# Altium PCB 十六路输入.PcbDoc (part 3 of 3)
Units mm, origin at the board's own origin, x right, y up, seen from the top; angles counter-clockwise.
Board outline 122.4 x 87.4 mm, 2 copper layers (Top Layer, Bottom Layer); 111 components, 112 nets, 343 pads, 40 vias.
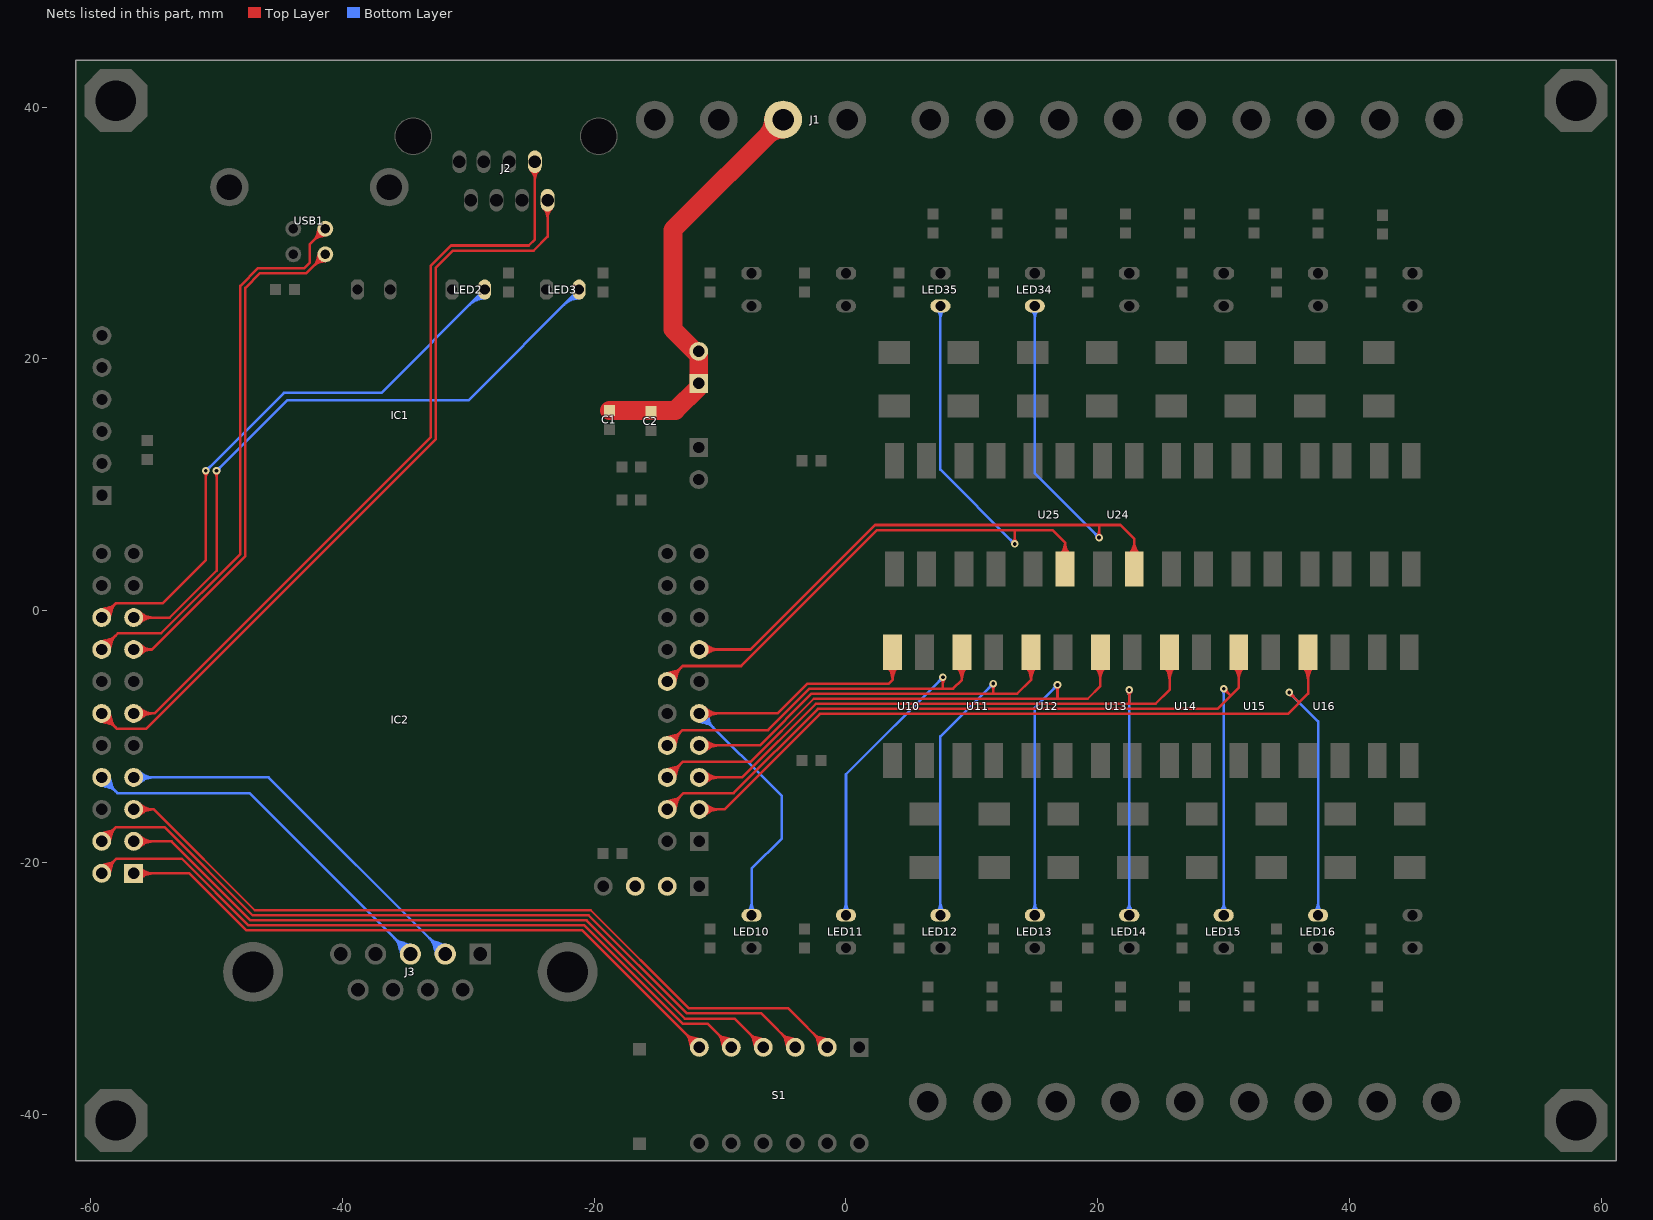
[diagram p3: the nets of this part, all layers, seen from the top]

## Via types
v1: diameter 0.6, hole 0.3, Top Layer to Bottom Layer, 40 vias

## Nets (pads, with @x,y where several pads share a name; then routed paths per layer and width w, separated by ;. In a path a pad name is that pad's centre, name@x,y a point inside that pad or via, vN(x,y) a via of type N, cw(c..) or ccw(c..) an arc to the next point about the centre after c; other vN are vias at no path point) (continued)
PB13: IC2.34 LED10.K U10.4 | length 70.6
  Top Layer w0.2: IC2.34@-11.66,-8.17 -5.43,-8.17 -3.06,-5.8 3.4,-5.8 3.7,-5.5 ; U10.4@3.7,-3.3 3.7,-5.5 ; -10.574,-8.17 cw(c-10.574,-7.084) -11.342,-7.852 ccw(c-10.574,-7.084) -10.574,-8.17 ; -10.574,-8.17 ccw(c-10.574,-9.256) -11.342,-8.488 cw(c-10.574,-9.256) -10.574,-8.17 ; -10.091,-8.17 cw(c-10.091,-6.601) -11.2,-7.71 ccw(c-10.091,-6.601) -10.091,-8.17 ; -10.091,-8.17 ccw(c-10.091,-9.739) -11.2,-8.63 cw(c-10.091,-9.739) -10.091,-8.17 ; 3.7,-5.5 cw(c5.223,-5.5) 4.156,-4.414 ccw(c5.223,-5.5) 3.7,-5.5 ; 3.7,-5.5 ccw(c2.177,-5.5) 3.244,-4.414 cw(c2.177,-5.5) 3.7,-5.5 ; 3.7,-5.023 cw(c4.754,-5.023) 4.015,-4.271 ccw(c4.754,-5.023) 3.7,-5.023 ; 3.7,-5.023 ccw(c2.646,-5.023) 3.385,-4.271 cw(c2.646,-5.023) 3.7,-5.023
  Bottom Layer w0.2: IC2.34@-12.003,-8.24 ccw(c-11.167,-8.069) -11.388,-8.893 ; IC2.34@-11.807,-8.2 ccw(c-10.813,-7.997) -11.076,-8.977 ; IC2.34@-11.66,-8.17 -5.1,-14.73 -5.1,-18.1 -7.5,-20.5 LED10.K@-7.5,-24.3 ; IC2.34@-11.63,-8.023 cw(c-11.833,-9.017) -10.853,-8.754 ; IC2.34@-11.59,-7.827 cw(c-11.761,-8.663) -10.937,-8.442 ; -10.892,-8.938 cw(c-10.124,-8.17) -11.21,-8.17 ccw(c-10.124,-8.17) -10.892,-8.938 ; -10.892,-8.938 ccw(c-11.66,-9.706) -11.66,-8.62 cw(c-11.66,-9.706) -10.892,-8.938 ; -10.55,-9.28 cw(c-9.441,-8.17) -11.01,-8.17 ccw(c-9.441,-8.17) -10.55,-9.28 ; -10.55,-9.28 ccw(c-11.66,-10.389) -11.66,-8.82 cw(c-11.66,-10.389) -10.55,-9.28 ; -7.5,-23.215 cw(c-8.485,-23.215) -7.788,-23.912 ccw(c-8.485,-23.215) -7.5,-23.215 ; -7.5,-23.215 ccw(c-6.515,-23.215) -7.212,-23.912 cw(c-6.515,-23.215) -7.5,-23.215
PB14: IC2.35 LED11.K U11.4 | length 79.2
  Top Layer w0.2: IC2.35@-14.543,-10.64 cw(c-13.707,-10.811) -13.928,-9.987 ; IC2.35@-14.347,-10.68 cw(c-13.353,-10.883) -13.616,-9.903 ; IC2.35@-14.201,-10.66 ccw(c-14.208,-10.046) -13.615,-10.205 ; IC2.35@-14.2,-10.71 -12.99,-9.5 -6.194,-9.5 -2.894,-6.2 7.7,-6.2 ; IC2.35@-14.17,-10.857 ccw(c-14.373,-9.863) -13.393,-10.126 ; IC2.35@-14.15,-10.711 cw(c-13.536,-10.718) -13.695,-10.125 ; IC2.35@-14.13,-11.053 ccw(c-14.301,-10.217) -13.477,-10.438 ; v1(7.7,-5.3) 7.7,-6.2 ; U11.4@9.2,-3.3 9.2,-5.5 ; -13.432,-9.942 cw(c-14.2,-9.174) -14.2,-10.26 ccw(c-14.2,-9.174) -13.432,-9.942 ; -13.432,-9.942 ccw(c-12.664,-10.71) -13.75,-10.71 cw(c-12.664,-10.71) -13.432,-9.942 ; -13.09,-9.6 cw(c-14.2,-8.491) -14.2,-10.06 ccw(c-14.2,-8.491) -13.09,-9.6 ; -13.09,-9.6 ccw(c-11.981,-10.71) -13.55,-10.71 cw(c-11.981,-10.71) -13.09,-9.6 ; 7.7,-6.2 8.5,-6.2 9.2,-5.5 ; 7.7,-5.783 cw(c8.183,-5.783) 7.841,-5.441 ccw(c8.183,-5.783) 7.7,-5.783 ; 7.7,-5.783 ccw(c7.217,-5.783) 7.559,-5.441 cw(c7.217,-5.783) 7.7,-5.783 ; 9.2,-5.5 cw(c10.723,-5.5) 9.656,-4.414 ccw(c10.723,-5.5) 9.2,-5.5 ; 9.2,-5.5 ccw(c7.677,-5.5) 8.744,-4.414 cw(c7.677,-5.5) 9.2,-5.5 ; 9.2,-5.023 cw(c10.254,-5.023) 9.515,-4.271 ccw(c10.254,-5.023) 9.2,-5.023 ; 9.2,-5.023 ccw(c8.146,-5.023) 8.885,-4.271 cw(c8.146,-5.023) 9.2,-5.023
  Bottom Layer w0.2: LED11.K@0,-24.3 0,-13 v1(7.7,-5.3) ; 0,-23.215 cw(c-0.985,-23.215) -0.288,-23.912 ccw(c-0.985,-23.215) 0,-23.215 ; 0,-23.215 ccw(c0.985,-23.215) 0.288,-23.912 cw(c0.985,-23.215) 0,-23.215 ; 7.359,-5.641 cw(c7.7,-5.983) 7.7,-5.5 ccw(c7.7,-5.983) 7.359,-5.641 ; 7.359,-5.641 ccw(c7.017,-5.3) 7.5,-5.3 cw(c7.017,-5.3) 7.359,-5.641
PB15: IC2.36 LED12.K U12.4 | length 74.4
  Top Layer w0.2: IC2.36@-11.66,-10.71 -6.838,-10.71 -2.728,-6.6 11.7,-6.6 ; v1(11.7,-5.8) 11.7,-6.6 ; U12.4@14.7,-3.3 14.7,-5.5 ; -10.574,-10.71 cw(c-10.574,-9.624) -11.342,-10.392 ccw(c-10.574,-9.624) -10.574,-10.71 ; -10.574,-10.71 ccw(c-10.574,-11.796) -11.342,-11.028 cw(c-10.574,-11.796) -10.574,-10.71 ; -10.091,-10.71 cw(c-10.091,-9.141) -11.2,-10.25 ccw(c-10.091,-9.141) -10.091,-10.71 ; -10.091,-10.71 ccw(c-10.091,-12.279) -11.2,-11.17 cw(c-10.091,-12.279) -10.091,-10.71 ; 11.7,-6.6 13.6,-6.6 14.7,-5.5 ; 11.7,-6.283 cw(c12.183,-6.283) 11.841,-5.941 ccw(c12.183,-6.283) 11.7,-6.283 ; 11.7,-6.283 ccw(c11.217,-6.283) 11.559,-5.941 cw(c11.217,-6.283) 11.7,-6.283 ; 14.7,-5.5 cw(c16.223,-5.5) 15.156,-4.414 ccw(c16.223,-5.5) 14.7,-5.5 ; 14.7,-5.5 ccw(c13.177,-5.5) 14.244,-4.414 cw(c13.177,-5.5) 14.7,-5.5 ; 14.7,-5.023 cw(c15.754,-5.023) 15.015,-4.271 ccw(c15.754,-5.023) 14.7,-5.023 ; 14.7,-5.023 ccw(c13.646,-5.023) 14.385,-4.271 cw(c13.646,-5.023) 14.7,-5.023
  Bottom Layer w0.2: LED12.K@7.5,-24.3 7.5,-10 v1(11.7,-5.8) ; 7.5,-23.215 cw(c6.515,-23.215) 7.212,-23.912 ccw(c6.515,-23.215) 7.5,-23.215 ; 7.5,-23.215 ccw(c8.485,-23.215) 7.788,-23.912 cw(c8.485,-23.215) 7.5,-23.215 ; 11.359,-6.141 cw(c11.7,-6.483) 11.7,-6 ccw(c11.7,-6.483) 11.359,-6.141 ; 11.359,-6.141 ccw(c11.017,-5.8) 11.5,-5.8 cw(c11.017,-5.8) 11.359,-6.141
PC0: IC2.1 S1.6 | length 73.1
  Top Layer w0.2: IC2.1@-56.58,-20.87 -52.158,-20.87 -47.628,-25.4 -20.94,-25.4 S1.6@-11.65,-34.69 ; -12.457,-34.106 ccw(c-11.477,-33.843) S1.6@-11.68,-34.837 ; -12.373,-34.418 ccw(c-11.549,-34.197) S1.6@-11.72,-35.033 ; -12.235,-34.185 ccw(c-11.642,-34.026) S1.6@-11.649,-34.64 ; -12.234,-33.883 cw(c-12.497,-34.863) S1.6@-11.503,-34.66 ; -12.155,-34.105 cw(c-12.314,-34.698) S1.6@-11.7,-34.691 ; -11.922,-33.967 cw(c-12.143,-34.791) S1.6@-11.307,-34.62 ; -55.494,-20.87 cw(c-55.494,-19.784) -56.262,-20.552 ccw(c-55.494,-19.784) -55.494,-20.87 ; -55.494,-20.87 ccw(c-55.494,-21.956) -56.262,-21.188 cw(c-55.494,-21.956) -55.494,-20.87 ; -55.011,-20.87 cw(c-55.011,-19.301) -56.12,-20.41 ccw(c-55.011,-19.301) -55.011,-20.87 ; -55.011,-20.87 ccw(c-55.011,-22.439) -56.12,-21.33 cw(c-55.011,-22.439) -55.011,-20.87 ; -12.76,-33.58 cw(c-13.869,-34.69) -12.3,-34.69 ccw(c-13.869,-34.69) -12.76,-33.58 ; -12.76,-33.58 ccw(c-11.65,-32.471) -11.65,-34.04 cw(c-11.65,-32.471) -12.76,-33.58 ; -12.418,-33.922 cw(c-13.186,-34.69) -12.1,-34.69 ccw(c-13.186,-34.69) -12.418,-33.922 ; -12.418,-33.922 ccw(c-11.65,-33.154) -11.65,-34.24 cw(c-11.65,-33.154) -12.418,-33.922
PC1: IC2.2 S1.5 | length 84.8
  Top Layer w0.2: IC2.2@-59.463,-20.8 cw(c-58.627,-20.971) -58.848,-20.147 ; IC2.2@-59.267,-20.84 cw(c-58.273,-21.043) -58.536,-20.063 ; IC2.2@-59.121,-20.82 ccw(c-59.128,-20.206) -58.535,-20.365 ; IC2.2@-59.12,-20.87 -57.95,-19.7 -52.763,-19.7 -47.463,-25 -20.774,-25 -12.974,-32.8 -11,-32.8 S1.5@-9.11,-34.69 ; IC2.2@-59.09,-21.017 ccw(c-59.293,-20.023) -58.313,-20.286 ; IC2.2@-59.07,-20.871 cw(c-58.456,-20.878) -58.615,-20.285 ; IC2.2@-59.05,-21.213 ccw(c-59.221,-20.377) -58.397,-20.598 ; -9.917,-34.106 ccw(c-8.937,-33.843) S1.5@-9.14,-34.837 ; -9.833,-34.418 ccw(c-9.009,-34.197) S1.5@-9.18,-35.033 ; -9.695,-34.185 ccw(c-9.102,-34.026) S1.5@-9.109,-34.64 ; -9.694,-33.883 cw(c-9.957,-34.863) S1.5@-8.963,-34.66 ; -9.615,-34.105 cw(c-9.774,-34.698) S1.5@-9.16,-34.691 ; -9.382,-33.967 cw(c-9.603,-34.791) S1.5@-8.767,-34.62 ; -58.352,-20.102 cw(c-59.12,-19.334) -59.12,-20.42 ccw(c-59.12,-19.334) -58.352,-20.102 ; -58.352,-20.102 ccw(c-57.584,-20.87) -58.67,-20.87 cw(c-57.584,-20.87) -58.352,-20.102 ; -58.01,-19.76 cw(c-59.12,-18.651) -59.12,-20.22 ccw(c-59.12,-18.651) -58.01,-19.76 ; -58.01,-19.76 ccw(c-56.901,-20.87) -58.47,-20.87 cw(c-56.901,-20.87) -58.01,-19.76 ; -10.22,-33.58 cw(c-11.329,-34.69) -9.76,-34.69 ccw(c-11.329,-34.69) -10.22,-33.58 ; -10.22,-33.58 ccw(c-9.11,-32.471) -9.11,-34.04 cw(c-9.11,-32.471) -10.22,-33.58 ; -9.878,-33.922 cw(c-10.646,-34.69) -9.56,-34.69 ccw(c-10.646,-34.69) -9.878,-33.922 ; -9.878,-33.922 ccw(c-9.11,-33.154) -9.11,-34.24 cw(c-9.11,-33.154) -9.878,-33.922
PC2: IC2.3 S1.4 | length 79.2
  Top Layer w0.2: IC2.3@-56.58,-18.33 -53.567,-18.33 -47.297,-24.6 -20.609,-24.6 -12.809,-32.4 -8.86,-32.4 S1.4@-6.57,-34.69 ; -7.377,-34.106 ccw(c-6.397,-33.843) S1.4@-6.6,-34.837 ; -7.293,-34.418 ccw(c-6.469,-34.197) S1.4@-6.64,-35.033 ; -7.155,-34.185 ccw(c-6.562,-34.026) S1.4@-6.569,-34.64 ; -7.154,-33.883 cw(c-7.417,-34.863) S1.4@-6.423,-34.66 ; -7.075,-34.105 cw(c-7.234,-34.698) S1.4@-6.62,-34.691 ; -6.842,-33.967 cw(c-7.063,-34.791) S1.4@-6.227,-34.62 ; -55.494,-18.33 cw(c-55.494,-17.244) -56.262,-18.012 ccw(c-55.494,-17.244) -55.494,-18.33 ; -55.494,-18.33 ccw(c-55.494,-19.416) -56.262,-18.648 cw(c-55.494,-19.416) -55.494,-18.33 ; -55.011,-18.33 cw(c-55.011,-16.761) -56.12,-17.87 ccw(c-55.011,-16.761) -55.011,-18.33 ; -55.011,-18.33 ccw(c-55.011,-19.899) -56.12,-18.79 cw(c-55.011,-19.899) -55.011,-18.33 ; -7.68,-33.58 cw(c-8.789,-34.69) -7.22,-34.69 ccw(c-8.789,-34.69) -7.68,-33.58 ; -7.68,-33.58 ccw(c-6.57,-32.471) -6.57,-34.04 cw(c-6.57,-32.471) -7.68,-33.58 ; -7.338,-33.922 cw(c-8.106,-34.69) -7.02,-34.69 ccw(c-8.106,-34.69) -7.338,-33.922 ; -7.338,-33.922 ccw(c-6.57,-33.154) -6.57,-34.24 cw(c-6.57,-33.154) -7.338,-33.922
PC3: IC2.4 S1.3 | length 90.9
  Top Layer w0.2: IC2.4@-59.463,-18.26 cw(c-58.627,-18.431) -58.848,-17.607 ; IC2.4@-59.267,-18.3 cw(c-58.273,-18.503) -58.536,-17.523 ; IC2.4@-59.121,-18.28 ccw(c-59.128,-17.666) -58.535,-17.825 ; IC2.4@-59.12,-18.33 -57.99,-17.2 -54.131,-17.2 -47.131,-24.2 -20.443,-24.2 -12.643,-32 -6.72,-32 S1.3@-4.03,-34.69 ; IC2.4@-59.09,-18.477 ccw(c-59.293,-17.483) -58.313,-17.746 ; IC2.4@-59.07,-18.331 cw(c-58.456,-18.338) -58.615,-17.745 ; IC2.4@-59.05,-18.673 ccw(c-59.221,-17.837) -58.397,-18.058 ; -4.837,-34.106 ccw(c-3.857,-33.843) S1.3@-4.06,-34.837 ; -4.753,-34.418 ccw(c-3.929,-34.197) S1.3@-4.1,-35.033 ; -4.615,-34.185 ccw(c-4.022,-34.026) S1.3@-4.029,-34.64 ; -4.614,-33.883 cw(c-4.877,-34.863) S1.3@-3.883,-34.66 ; -4.535,-34.105 cw(c-4.694,-34.698) S1.3@-4.08,-34.691 ; -4.302,-33.967 cw(c-4.523,-34.791) S1.3@-3.687,-34.62 ; -58.352,-17.562 cw(c-59.12,-16.794) -59.12,-17.88 ccw(c-59.12,-16.794) -58.352,-17.562 ; -58.352,-17.562 ccw(c-57.584,-18.33) -58.67,-18.33 cw(c-57.584,-18.33) -58.352,-17.562 ; -58.01,-17.22 cw(c-59.12,-16.111) -59.12,-17.68 ccw(c-59.12,-16.111) -58.01,-17.22 ; -58.01,-17.22 ccw(c-56.901,-18.33) -58.47,-18.33 cw(c-56.901,-18.33) -58.01,-17.22 ; -5.14,-33.58 cw(c-6.249,-34.69) -4.68,-34.69 ccw(c-6.249,-34.69) -5.14,-33.58 ; -5.14,-33.58 ccw(c-4.03,-32.471) -4.03,-34.04 cw(c-4.03,-32.471) -5.14,-33.58 ; -4.798,-33.922 cw(c-5.566,-34.69) -4.48,-34.69 ccw(c-5.566,-34.69) -4.798,-33.922 ; -4.798,-33.922 ccw(c-4.03,-33.154) -4.03,-34.24 cw(c-4.03,-33.154) -4.798,-33.922
PC4: IC2.30 LED34.K U24.4 | length 85.8
  Top Layer w0.2: IC2.30@-11.66,-3.09 -7.587,-3.09 2.303,6.8 20.1,6.8 ; v1(20.1,5.8) 20.1,6.8 ; U24.4@22.9,3.3 22.9,5.7 21.8,6.8 20.1,6.8 ; -10.574,-3.09 cw(c-10.574,-2.004) -11.342,-2.772 ccw(c-10.574,-2.004) -10.574,-3.09 ; -10.574,-3.09 ccw(c-10.574,-4.176) -11.342,-3.408 cw(c-10.574,-4.176) -10.574,-3.09 ; -10.091,-3.09 cw(c-10.091,-1.521) -11.2,-2.63 ccw(c-10.091,-1.521) -10.091,-3.09 ; -10.091,-3.09 ccw(c-10.091,-4.659) -11.2,-3.55 cw(c-10.091,-4.659) -10.091,-3.09 ; 20.1,6.283 cw(c19.617,6.283) 19.959,5.941 ccw(c19.617,6.283) 20.1,6.283 ; 20.1,6.283 ccw(c20.583,6.283) 20.241,5.941 cw(c20.583,6.283) 20.1,6.283 ; 22.9,5.036 cw(c21.814,5.036) 22.582,4.268 ccw(c21.814,5.036) 22.9,5.036 ; 22.9,5.036 ccw(c23.986,5.036) 23.218,4.268 cw(c23.986,5.036) 22.9,5.036 ; 22.9,5.519 cw(c21.331,5.519) 22.44,4.41 ccw(c21.331,5.519) 22.9,5.519 ; 22.9,5.519 ccw(c24.469,5.519) 23.36,4.41 cw(c24.469,5.519) 22.9,5.519
  Bottom Layer w0.2: LED34.K@15,24.2 15,10.9 v1(20.1,5.8) ; 15,23.215 cw(c15.985,23.215) 15.289,23.912 ccw(c15.985,23.215) 15,23.215 ; 15,23.215 ccw(c14.015,23.215) 14.712,23.912 cw(c14.015,23.215) 15,23.215 ; 19.759,6.141 cw(c19.417,5.8) 19.9,5.8 ccw(c19.417,5.8) 19.759,6.141 ; 19.759,6.141 ccw(c20.1,6.483) 20.1,6 cw(c20.1,6.483) 19.759,6.141
PC5: IC2.31 LED35.K U25.4 | length 89.1
  Top Layer w0.2: IC2.31@-14.543,-5.56 cw(c-13.707,-5.731) -13.928,-4.907 ; IC2.31@-14.347,-5.6 cw(c-13.353,-5.803) -13.616,-4.823 ; IC2.31@-14.201,-5.58 ccw(c-14.208,-4.966) -13.615,-5.125 ; IC2.31@-14.2,-5.63 -12.97,-4.4 -8.331,-4.4 2.469,6.4 13.4,6.4 ; IC2.31@-14.17,-5.777 ccw(c-14.373,-4.783) -13.393,-5.046 ; IC2.31@-14.15,-5.631 cw(c-13.536,-5.638) -13.695,-5.045 ; IC2.31@-14.13,-5.973 ccw(c-14.301,-5.137) -13.477,-5.358 ; v1(13.4,5.3) 13.4,6.4 ; U25.4@17.4,3.3 17.4,5.4 ; -13.432,-4.862 cw(c-14.2,-4.094) -14.2,-5.18 ccw(c-14.2,-4.094) -13.432,-4.862 ; -13.432,-4.862 ccw(c-12.664,-5.63) -13.75,-5.63 cw(c-12.664,-5.63) -13.432,-4.862 ; -13.09,-4.52 cw(c-14.2,-3.411) -14.2,-4.98 ccw(c-14.2,-3.411) -13.09,-4.52 ; -13.09,-4.52 ccw(c-11.981,-5.63) -13.55,-5.63 cw(c-11.981,-5.63) -13.09,-4.52 ; 13.4,5.783 cw(c12.917,5.783) 13.259,5.441 ccw(c12.917,5.783) 13.4,5.783 ; 13.4,5.783 ccw(c13.883,5.783) 13.541,5.441 cw(c13.883,5.783) 13.4,5.783 ; 13.4,6.4 16.4,6.4 17.4,5.4 ; 17.4,4.954 cw(c16.505,4.954) 17.101,4.286 ccw(c16.505,4.954) 17.4,4.954 ; 17.4,4.954 ccw(c18.295,4.954) 17.699,4.286 cw(c18.295,4.954) 17.4,4.954 ; 17.4,5.4 cw(c16.108,5.4) 16.968,4.435 ccw(c16.108,5.4) 17.4,5.4 ; 17.4,5.4 ccw(c18.692,5.4) 17.832,4.435 cw(c18.692,5.4) 17.4,5.4
  Bottom Layer w0.2: LED35.K@7.5,24.2 7.5,11.2 v1(13.4,5.3) ; 7.5,23.215 cw(c8.485,23.215) 7.788,23.912 ccw(c8.485,23.215) 7.5,23.215 ; 7.5,23.215 ccw(c6.515,23.215) 7.212,23.912 cw(c6.515,23.215) 7.5,23.215 ; 13.059,5.641 cw(c12.717,5.3) 13.2,5.3 ccw(c12.717,5.3) 13.059,5.641 ; 13.059,5.641 ccw(c13.4,5.983) 13.4,5.5 cw(c13.4,5.983) 13.059,5.641
PC6: IC2.37 LED13.K U13.4 | length 88.9
  Top Layer w0.2: IC2.37@-14.543,-13.18 cw(c-13.707,-13.351) -13.928,-12.527 ; IC2.37@-14.347,-13.22 cw(c-13.353,-13.423) -13.616,-12.443 ; IC2.37@-14.201,-13.2 ccw(c-14.208,-12.586) -13.615,-12.745 ; IC2.37@-14.2,-13.25 -12.95,-12 -7.563,-12 -2.563,-7 16.8,-7 ; IC2.37@-14.17,-13.397 ccw(c-14.373,-12.403) -13.393,-12.666 ; IC2.37@-14.15,-13.251 cw(c-13.536,-13.258) -13.695,-12.665 ; IC2.37@-14.13,-13.593 ccw(c-14.301,-12.757) -13.477,-12.978 ; v1(16.8,-5.9) 16.8,-7 ; U13.4@20.2,-3.3 20.2,-6 19.2,-7 16.8,-7 ; -13.432,-12.482 cw(c-14.2,-11.714) -14.2,-12.8 ccw(c-14.2,-11.714) -13.432,-12.482 ; -13.432,-12.482 ccw(c-12.664,-13.25) -13.75,-13.25 cw(c-12.664,-13.25) -13.432,-12.482 ; -13.09,-12.14 cw(c-14.2,-11.031) -14.2,-12.6 ccw(c-14.2,-11.031) -13.09,-12.14 ; -13.09,-12.14 ccw(c-11.981,-13.25) -13.55,-13.25 cw(c-11.981,-13.25) -13.09,-12.14 ; 16.8,-6.383 cw(c17.283,-6.383) 16.941,-6.041 ccw(c17.283,-6.383) 16.8,-6.383 ; 16.8,-6.383 ccw(c16.317,-6.383) 16.659,-6.041 cw(c16.317,-6.383) 16.8,-6.383 ; 20.2,-5.519 cw(c21.769,-5.519) 20.66,-4.41 ccw(c21.769,-5.519) 20.2,-5.519 ; 20.2,-5.519 ccw(c18.631,-5.519) 19.74,-4.41 cw(c18.631,-5.519) 20.2,-5.519 ; 20.2,-5.036 cw(c21.286,-5.036) 20.518,-4.268 ccw(c21.286,-5.036) 20.2,-5.036 ; 20.2,-5.036 ccw(c19.114,-5.036) 19.882,-4.268 cw(c19.114,-5.036) 20.2,-5.036
  Bottom Layer w0.2: LED13.K@15,-24.3 15,-7.7 v1(16.8,-5.9) ; 15,-23.215 cw(c14.015,-23.215) 14.712,-23.912 ccw(c14.015,-23.215) 15,-23.215 ; 15,-23.215 ccw(c15.985,-23.215) 15.289,-23.912 cw(c15.985,-23.215) 15,-23.215 ; 16.459,-6.241 cw(c16.8,-6.583) 16.8,-6.1 ccw(c16.8,-6.583) 16.459,-6.241 ; 16.459,-6.241 ccw(c16.117,-5.9) 16.6,-5.9 cw(c16.117,-5.9) 16.459,-6.241
PC7: IC2.38 LED14.K U14.4 | length 85.2
  Top Layer w0.2: IC2.38@-11.66,-13.25 -8.247,-13.25 -2.397,-7.4 22.5,-7.4 ; v1(22.5,-6.3) 22.5,-7.4 ; U14.4@25.7,-3.3 25.7,-6.3 24.6,-7.4 22.5,-7.4 ; -10.574,-13.25 cw(c-10.574,-12.164) -11.342,-12.932 ccw(c-10.574,-12.164) -10.574,-13.25 ; -10.574,-13.25 ccw(c-10.574,-14.336) -11.342,-13.568 cw(c-10.574,-14.336) -10.574,-13.25 ; -10.091,-13.25 cw(c-10.091,-11.681) -11.2,-12.79 ccw(c-10.091,-11.681) -10.091,-13.25 ; -10.091,-13.25 ccw(c-10.091,-14.819) -11.2,-13.71 cw(c-10.091,-14.819) -10.091,-13.25 ; 22.5,-6.783 cw(c22.983,-6.783) 22.641,-6.441 ccw(c22.983,-6.783) 22.5,-6.783 ; 22.5,-6.783 ccw(c22.017,-6.783) 22.359,-6.441 cw(c22.017,-6.783) 22.5,-6.783 ; 25.7,-5.519 cw(c27.269,-5.519) 26.16,-4.41 ccw(c27.269,-5.519) 25.7,-5.519 ; 25.7,-5.519 ccw(c24.131,-5.519) 25.24,-4.41 cw(c24.131,-5.519) 25.7,-5.519 ; 25.7,-5.036 cw(c26.786,-5.036) 26.018,-4.268 ccw(c26.786,-5.036) 25.7,-5.036 ; 25.7,-5.036 ccw(c24.614,-5.036) 25.382,-4.268 cw(c24.614,-5.036) 25.7,-5.036
  Bottom Layer w0.2: LED14.K@22.5,-24.3 LED14.K@22.5,-24.2 v1(22.5,-6.3) ; 22.5,-23.215 cw(c21.515,-23.215) 22.212,-23.912 ccw(c21.515,-23.215) 22.5,-23.215 ; 22.5,-23.215 ccw(c23.485,-23.215) 22.789,-23.912 cw(c23.485,-23.215) 22.5,-23.215 ; 22.5,-6.783 cw(c22.983,-6.783) 22.641,-6.441 ccw(c22.983,-6.783) 22.5,-6.783 ; 22.5,-6.783 ccw(c22.017,-6.783) 22.359,-6.441 cw(c22.017,-6.783) 22.5,-6.783
PC8: IC2.39 LED15.K U15.4 | length 100.3
  Top Layer w0.2: IC2.39@-14.543,-15.72 cw(c-13.707,-15.891) -13.928,-15.067 ; IC2.39@-14.347,-15.76 cw(c-13.353,-15.963) -13.616,-14.983 ; IC2.39@-14.201,-15.74 ccw(c-14.208,-15.126) -13.615,-15.285 ; IC2.39@-14.2,-15.79 -12.91,-14.5 -8.931,-14.5 -2.231,-7.8 29.5,-7.8 31.2,-6.1 U15.4@31.2,-3.3 ; IC2.39@-14.17,-15.937 ccw(c-14.373,-14.943) -13.393,-15.206 ; IC2.39@-14.15,-15.791 cw(c-13.536,-15.798) -13.695,-15.205 ; IC2.39@-14.13,-16.133 ccw(c-14.301,-15.297) -13.477,-15.518 ; 30.252,-6.468 cw(c30.342,-6.13) v1(30,-6.2) ; 30.268,-6.452 ccw(c29.93,-6.542) v1(30,-6.2) ; 30.5,-6.7 v1(30,-6.2) ; -13.432,-15.022 cw(c-14.2,-14.254) -14.2,-15.34 ccw(c-14.2,-14.254) -13.432,-15.022 ; -13.432,-15.022 ccw(c-12.664,-15.79) -13.75,-15.79 cw(c-12.664,-15.79) -13.432,-15.022 ; -13.09,-14.68 cw(c-14.2,-13.571) -14.2,-15.14 ccw(c-14.2,-13.571) -13.09,-14.68 ; -13.09,-14.68 ccw(c-11.981,-15.79) -13.55,-15.79 cw(c-11.981,-15.79) -13.09,-14.68 ; 30.341,-6.541 cw(c30.683,-6.2) 30.2,-6.2 ccw(c30.683,-6.2) 30.341,-6.541 ; 30.341,-6.541 ccw(c30,-6.883) 30,-6.4 cw(c30,-6.883) 30.341,-6.541 ; 31.2,-5.519 cw(c32.769,-5.519) 31.66,-4.41 ccw(c32.769,-5.519) 31.2,-5.519 ; 31.2,-5.519 ccw(c29.631,-5.519) 30.74,-4.41 cw(c29.631,-5.519) 31.2,-5.519 ; 31.2,-5.036 cw(c32.286,-5.036) 31.518,-4.268 ccw(c32.286,-5.036) 31.2,-5.036 ; 31.2,-5.036 ccw(c30.114,-5.036) 30.882,-4.268 cw(c30.114,-5.036) 31.2,-5.036
  Bottom Layer w0.2: LED15.K@30,-24.3 v1(30,-6.2) ; 30,-23.215 cw(c29.015,-23.215) 29.712,-23.912 ccw(c29.015,-23.215) 30,-23.215 ; 30,-23.215 ccw(c30.985,-23.215) 30.289,-23.912 cw(c30.985,-23.215) 30,-23.215 ; 30,-6.683 cw(c30.483,-6.683) 30.141,-6.341 ccw(c30.483,-6.683) 30,-6.683 ; 30,-6.683 ccw(c29.517,-6.683) 29.859,-6.341 cw(c29.517,-6.683) 30,-6.683
PC9: IC2.40 LED16.K U16.4 | length 99
  Top Layer w0.2: IC2.40@-11.66,-15.79 -9.656,-15.79 -2.066,-8.2 35.1,-8.2 36.7,-6.6 U16.4@36.7,-3.2 ; 35.452,-6.768 cw(c35.542,-6.43) v1(35.2,-6.5) ; 35.468,-6.752 ccw(c35.13,-6.842) v1(35.2,-6.5) ; 36,-7.3 v1(35.2,-6.5) ; -10.574,-15.79 cw(c-10.574,-14.704) -11.342,-15.472 ccw(c-10.574,-14.704) -10.574,-15.79 ; -10.574,-15.79 ccw(c-10.574,-16.876) -11.342,-16.108 cw(c-10.574,-16.876) -10.574,-15.79 ; -10.091,-15.79 cw(c-10.091,-14.221) -11.2,-15.33 ccw(c-10.091,-14.221) -10.091,-15.79 ; -10.091,-15.79 ccw(c-10.091,-17.359) -11.2,-16.25 cw(c-10.091,-17.359) -10.091,-15.79 ; 35.541,-6.841 cw(c35.883,-6.5) 35.4,-6.5 ccw(c35.883,-6.5) 35.541,-6.841 ; 35.541,-6.841 ccw(c35.2,-7.183) 35.2,-6.7 cw(c35.2,-7.183) 35.541,-6.841 ; 36.7,-5.519 cw(c38.269,-5.519) 37.16,-4.41 ccw(c38.269,-5.519) 36.7,-5.519 ; 36.7,-5.519 ccw(c35.131,-5.519) 36.24,-4.41 cw(c35.131,-5.519) 36.7,-5.519 ; 36.7,-5.036 cw(c37.786,-5.036) 37.018,-4.268 ccw(c37.786,-5.036) 36.7,-5.036 ; 36.7,-5.036 ccw(c35.614,-5.036) 36.382,-4.268 cw(c35.614,-5.036) 36.7,-5.036
  Bottom Layer w0.2: v1(35.2,-6.5) 37.5,-8.8 LED16.K@37.5,-24.3 ; 35.541,-6.841 cw(c35.883,-6.5) 35.4,-6.5 ccw(c35.883,-6.5) 35.541,-6.841 ; 35.541,-6.841 ccw(c35.2,-7.183) 35.2,-6.7 cw(c35.2,-7.183) 35.541,-6.841 ; 37.5,-23.215 cw(c36.515,-23.215) 37.212,-23.912 ccw(c36.515,-23.215) 37.5,-23.215 ; 37.5,-23.215 ccw(c38.485,-23.215) 37.789,-23.912 cw(c38.485,-23.215) 37.5,-23.215
PC10: IC2.45
PC11: IC2.44
PC12: IC2.17 LED3.K | length 65.3
  Top Layer w0.2: IC2.17@-56.58,-0.55 -53.716,-0.55 -50,3.166 v1(-50,11.1) ; -55.494,-0.55 cw(c-55.494,0.536) -56.262,-0.232 ccw(c-55.494,0.536) -55.494,-0.55 ; -55.494,-0.55 ccw(c-55.494,-1.636) -56.262,-0.868 cw(c-55.494,-1.636) -55.494,-0.55 ; -55.011,-0.55 cw(c-55.011,1.019) -56.12,-0.09 ccw(c-55.011,1.019) -55.011,-0.55 ; -55.011,-0.55 ccw(c-55.011,-2.119) -56.12,-1.01 cw(c-55.011,-2.119) -55.011,-0.55 ; -50,10.617 cw(c-49.517,10.617) -49.859,10.959 ccw(c-49.517,10.617) -50,10.617 ; -50,10.617 ccw(c-50.483,10.617) -50.141,10.959 cw(c-50.483,10.617) -50,10.617
  Bottom Layer w0.2: v1(-50,11.1) -44.4,16.7 -30,16.7 LED3.K@-21.2,25.5 ; -22.395,24.305 cw(c-21.2,23.11) LED3.K@-21.2,24.8 ; -22.054,24.646 cw(c-21.2,23.793) LED3.K@-21.2,25 ; -21.712,24.988 cw(c-21.2,24.475) LED3.K@-21.2,25.2 ; -21.69,25.01 ccw(c-21.888,25.208) LED3.K@-21.608,25.208 ; -49.659,11.441 cw(c-50,11.783) -50,11.3 ccw(c-50,11.783) -49.659,11.441 ; -49.659,11.441 ccw(c-49.317,11.1) -49.8,11.1 cw(c-49.317,11.1) -49.659,11.441
PC13: IC2.5 S1.2 | length 85.3
  Top Layer w0.2: IC2.5@-56.58,-15.79 -54.976,-15.79 -46.966,-23.8 -20.277,-23.8 -12.477,-31.6 -4.58,-31.6 S1.2@-1.49,-34.69 ; -2.297,-34.106 ccw(c-1.317,-33.843) S1.2@-1.52,-34.837 ; -2.213,-34.418 ccw(c-1.389,-34.197) S1.2@-1.56,-35.033 ; -2.075,-34.185 ccw(c-1.482,-34.026) S1.2@-1.489,-34.64 ; -2.074,-33.883 cw(c-2.337,-34.863) S1.2@-1.343,-34.66 ; -1.995,-34.105 cw(c-2.154,-34.698) S1.2@-1.54,-34.691 ; -1.762,-33.967 cw(c-1.983,-34.791) S1.2@-1.147,-34.62 ; -55.494,-15.79 cw(c-55.494,-14.704) -56.262,-15.472 ccw(c-55.494,-14.704) -55.494,-15.79 ; -55.494,-15.79 ccw(c-55.494,-16.876) -56.262,-16.108 cw(c-55.494,-16.876) -55.494,-15.79 ; -55.011,-15.79 cw(c-55.011,-14.221) -56.12,-15.33 ccw(c-55.011,-14.221) -55.011,-15.79 ; -55.011,-15.79 ccw(c-55.011,-17.359) -56.12,-16.25 cw(c-55.011,-17.359) -55.011,-15.79 ; -2.6,-33.58 cw(c-3.709,-34.69) -2.14,-34.69 ccw(c-3.709,-34.69) -2.6,-33.58 ; -2.6,-33.58 ccw(c-1.49,-32.471) -1.49,-34.04 cw(c-1.49,-32.471) -2.6,-33.58 ; -2.258,-33.922 cw(c-3.026,-34.69) -1.94,-34.69 ccw(c-3.026,-34.69) -2.258,-33.922 ; -2.258,-33.922 ccw(c-1.49,-33.154) -1.49,-34.24 cw(c-1.49,-33.154) -2.258,-33.922
PD2: IC2.18 LED2.K | length 65.5
  Top Layer w0.2: IC2.18@-59.463,-0.48 cw(c-58.627,-0.651) -58.848,0.173 ; IC2.18@-59.267,-0.52 cw(c-58.273,-0.723) -58.536,0.257 ; IC2.18@-59.121,-0.5 ccw(c-59.128,0.114) -58.535,-0.045 ; IC2.18@-59.12,-0.55 -57.97,0.6 -54.266,0.6 -50.849,4.017 v1(-50.849,11.1) ; IC2.18@-59.09,-0.697 ccw(c-59.293,0.297) -58.313,0.034 ; IC2.18@-59.07,-0.551 cw(c-58.456,-0.558) -58.615,0.035 ; IC2.18@-59.05,-0.893 ccw(c-59.221,-0.057) -58.397,-0.278 ; -58.352,0.218 cw(c-59.12,0.986) -59.12,-0.1 ccw(c-59.12,0.986) -58.352,0.218 ; -58.352,0.218 ccw(c-57.584,-0.55) -58.67,-0.55 cw(c-57.584,-0.55) -58.352,0.218 ; -58.01,0.56 cw(c-59.12,1.669) -59.12,0.1 ccw(c-59.12,1.669) -58.01,0.56 ; -58.01,0.56 ccw(c-56.901,-0.55) -58.47,-0.55 cw(c-56.901,-0.55) -58.01,0.56 ; -50.849,10.617 cw(c-50.366,10.617) -50.707,10.959 ccw(c-50.366,10.617) -50.849,10.617 ; -50.849,10.617 ccw(c-51.331,10.617) -50.99,10.959 cw(c-51.331,10.617) -50.849,10.617
  Bottom Layer w0.2: v1(-50.849,11.1) -44.649,17.3 -36.9,17.3 LED2.K@-28.7,25.5 ; -29.895,24.305 cw(c-28.7,23.11) LED2.K@-28.7,24.8 ; -29.554,24.646 cw(c-28.7,23.793) LED2.K@-28.7,25 ; -29.212,24.988 cw(c-28.7,24.475) LED2.K@-28.7,25.2 ; -29.19,25.01 ccw(c-29.388,25.208) LED2.K@-29.108,25.208 ; -50.507,11.441 cw(c-50.849,11.783) -50.849,11.3 ccw(c-50.849,11.783) -50.507,11.441 ; -50.507,11.441 ccw(c-50.166,11.1) -50.649,11.1 cw(c-50.166,11.1) -50.507,11.441
RJ45_RX: IC2.11 J2.2 | length 75.2
  Top Layer w0.2: IC2.11@-56.58,-8.17 -54.936,-8.17 -33,13.766 -33,27.366 -31.366,29 -25.2,29 -24.716,29.484 J2.2@-24.716,35.648 ; -55.494,-8.17 cw(c-55.494,-7.084) -56.262,-7.852 ccw(c-55.494,-7.084) -55.494,-8.17 ; -55.494,-8.17 ccw(c-55.494,-9.256) -56.262,-8.488 cw(c-55.494,-9.256) -55.494,-8.17 ; -55.011,-8.17 cw(c-55.011,-6.601) -56.12,-7.71 ccw(c-55.011,-6.601) -55.011,-8.17 ; -55.011,-8.17 ccw(c-55.011,-9.739) -56.12,-8.63 cw(c-55.011,-9.739) -55.011,-8.17 ; -24.716,34.212 cw(c-23.63,34.212) -24.398,34.98 ccw(c-23.63,34.212) -24.716,34.212 ; -24.716,34.212 ccw(c-25.802,34.212) -25.034,34.98 cw(c-25.802,34.212) -24.716,34.212 ; -24.716,34.694 cw(c-24.112,34.694) -24.539,35.121 ccw(c-24.112,34.694) -24.716,34.694 ; -24.716,34.694 ccw(c-25.32,34.694) -24.893,35.121 cw(c-25.32,34.694) -24.716,34.694
RJ45_TX: IC2.12 J2.1 | length 82.4
  Top Layer w0.2: IC2.12@-59.463,-8.24 ccw(c-58.627,-8.069) -58.848,-8.893 ; IC2.12@-59.267,-8.2 ccw(c-58.273,-7.997) -58.536,-8.977 ; IC2.12@-59.121,-8.22 cw(c-59.128,-8.834) -58.535,-8.675 ; IC2.12@-59.12,-8.17 -57.89,-9.4 -55.6,-9.4 -32.6,13.6 -32.6,27.2 -31.2,28.6 -24.8,28.6 -23.7,29.7 J2.1@-23.7,32.6 ; IC2.12@-59.09,-8.023 cw(c-59.293,-9.017) -58.313,-8.754 ; IC2.12@-59.07,-8.169 ccw(c-58.456,-8.162) -58.615,-8.755 ; IC2.12@-59.05,-7.827 cw(c-59.221,-8.663) -58.397,-8.442 ; -58.352,-8.938 cw(c-57.584,-8.17) -58.67,-8.17 ccw(c-57.584,-8.17) -58.352,-8.938 ; -58.352,-8.938 ccw(c-59.12,-9.706) -59.12,-8.62 cw(c-59.12,-9.706) -58.352,-8.938 ; -58.01,-9.28 cw(c-56.901,-8.17) -58.47,-8.17 ccw(c-56.901,-8.17) -58.01,-9.28 ; -58.01,-9.28 ccw(c-59.12,-10.389) -59.12,-8.82 cw(c-59.12,-10.389) -58.01,-9.28 ; -23.7,31.164 cw(c-22.614,31.164) -23.382,31.932 ccw(c-22.614,31.164) -23.7,31.164 ; -23.7,31.164 ccw(c-24.786,31.164) -24.018,31.932 cw(c-24.786,31.164) -23.7,31.164 ; -23.7,31.646 cw(c-23.096,31.646) -23.523,32.073 ccw(c-23.096,31.646) -23.7,31.646 ; -23.7,31.646 ccw(c-24.304,31.646) -23.877,32.073 cw(c-24.304,31.646) -23.7,31.646
RS232_RX: IC2.7 J3.2 | length 53.9
  Bottom Layer w0.2: IC2.7@-56.58,-13.25 -45.86,-13.25 J3.2@-31.83,-27.28 ; -32.803,-26.427 ccw(c-31.589,-26.102) J3.2@-31.841,-27.334 ; -32.72,-26.74 ccw(c-31.661,-26.456) J3.2@-31.881,-27.53 ; -32.683,-26.307 cw(c-33.008,-27.521) J3.2@-31.776,-27.269 ; -32.37,-26.39 cw(c-32.654,-27.449) J3.2@-31.58,-27.229 ; -55.494,-13.25 cw(c-55.494,-12.164) -56.262,-12.932 ccw(c-55.494,-12.164) -55.494,-13.25 ; -55.494,-13.25 ccw(c-55.494,-14.336) -56.262,-13.568 cw(c-55.494,-14.336) -55.494,-13.25 ; -55.011,-13.25 cw(c-55.011,-11.681) -56.12,-12.79 ccw(c-55.011,-11.681) -55.011,-13.25 ; -55.011,-13.25 ccw(c-55.011,-14.819) -56.12,-13.71 cw(c-55.011,-14.819) -55.011,-13.25 ; -33.102,-26.008 cw(c-34.374,-27.28) -32.575,-27.28 ccw(c-34.374,-27.28) -33.102,-26.008 ; -33.102,-26.008 ccw(c-31.83,-24.736) -31.83,-26.535 cw(c-31.83,-24.736) -33.102,-26.008 ; -32.76,-26.35 cw(c-33.691,-27.28) -32.375,-27.28 ccw(c-33.691,-27.28) -32.76,-26.35 ; -32.76,-26.35 ccw(c-31.83,-25.419) -31.83,-26.735 cw(c-31.83,-25.419) -32.76,-26.35
RS232_TX: IC2.8 J3.3 | length 57.8
  Bottom Layer w0.2: IC2.8@-59.463,-13.32 ccw(c-58.627,-13.149) -58.848,-13.973 ; IC2.8@-59.267,-13.28 ccw(c-58.273,-13.077) -58.536,-14.057 ; IC2.8@-59.12,-13.25 -57.87,-14.5 -47.38,-14.5 J3.3@-34.6,-27.28 ; IC2.8@-59.09,-13.103 cw(c-59.293,-14.097) -58.313,-13.834 ; IC2.8@-59.05,-12.907 cw(c-59.221,-13.743) -58.397,-13.522 ; -35.573,-26.427 ccw(c-34.359,-26.102) J3.3@-34.611,-27.334 ; -35.49,-26.74 ccw(c-34.431,-26.456) J3.3@-34.651,-27.53 ; -35.453,-26.307 cw(c-35.778,-27.521) J3.3@-34.546,-27.269 ; -35.14,-26.39 cw(c-35.424,-27.449) J3.3@-34.35,-27.229 ; -58.352,-14.018 cw(c-57.584,-13.25) -58.67,-13.25 ccw(c-57.584,-13.25) -58.352,-14.018 ; -58.352,-14.018 ccw(c-59.12,-14.786) -59.12,-13.7 cw(c-59.12,-14.786) -58.352,-14.018 ; -58.01,-14.36 cw(c-56.901,-13.25) -58.47,-13.25 ccw(c-56.901,-13.25) -58.01,-14.36 ; -58.01,-14.36 ccw(c-59.12,-15.469) -59.12,-13.9 cw(c-59.12,-15.469) -58.01,-14.36 ; -35.872,-26.008 cw(c-37.144,-27.28) -35.345,-27.28 ccw(c-37.144,-27.28) -35.872,-26.008 ; -35.872,-26.008 ccw(c-34.6,-24.736) -34.6,-26.535 cw(c-34.6,-24.736) -35.872,-26.008 ; -35.53,-26.35 cw(c-36.461,-27.28) -35.145,-27.28 ccw(c-36.461,-27.28) -35.53,-26.35 ; -35.53,-26.35 ccw(c-34.6,-25.419) -34.6,-26.735 cw(c-34.6,-25.419) -35.53,-26.35
USB_D+: IC2.16 USB1.3 | length 69.2
  Top Layer w0.2: IC2.16@-59.463,-3.02 cw(c-58.627,-3.191) -58.848,-2.367 ; IC2.16@-59.267,-3.06 cw(c-58.273,-3.263) -58.536,-2.283 ; IC2.16@-59.121,-3.04 ccw(c-59.128,-2.426) -58.535,-2.585 ; IC2.16@-59.12,-3.09 -57.83,-1.8 -54.4,-1.8 -48.1,4.5 -48.1,25.8 -46.7,27.2 -43.026,27.2 -42.6,27.626 -42.6,29.092 USB1.3@-41.36,30.332 ; IC2.16@-59.09,-3.237 ccw(c-59.293,-2.243) -58.313,-2.506 ; IC2.16@-59.07,-3.091 cw(c-58.456,-3.098) -58.615,-2.505 ; IC2.16@-59.05,-3.433 ccw(c-59.221,-2.597) -58.397,-2.818 ; -42.048,29.76 cw(c-41.196,29.531) USB1.3@-41.373,30.396 ; -41.965,30.072 cw(c-41.269,29.886) USB1.3@-41.413,30.592 ; -41.932,29.644 ccw(c-42.161,30.496) USB1.3@-41.296,30.319 ; -41.62,29.727 ccw(c-41.806,30.423) USB1.3@-41.1,30.279 ; -58.352,-2.322 cw(c-59.12,-1.554) -59.12,-2.64 ccw(c-59.12,-1.554) -58.352,-2.322 ; -58.352,-2.322 ccw(c-57.584,-3.09) -58.67,-3.09 cw(c-57.584,-3.09) -58.352,-2.322 ; -58.01,-1.98 cw(c-59.12,-0.871) -59.12,-2.44 ccw(c-59.12,-0.871) -58.01,-1.98 ; -58.01,-1.98 ccw(c-56.901,-3.09) -58.47,-3.09 cw(c-56.901,-3.09) -58.01,-1.98 ; -42.273,29.419 cw(c-41.36,28.505) -41.36,29.797 ccw(c-41.36,28.505) -42.273,29.419 ; -42.273,29.419 ccw(c-43.187,30.332) -41.895,30.332 cw(c-43.187,30.332) -42.273,29.419 ; -41.932,29.76 cw(c-41.36,29.188) -41.36,29.997 ccw(c-41.36,29.188) -41.932,29.76 ; -41.932,29.76 ccw(c-42.504,30.332) -41.695,30.332 cw(c-42.504,30.332) -41.932,29.76
USB_D-: IC2.15 USB1.2 | length 58.3
  Top Layer w0.2: IC2.15@-56.58,-3.09 -55.124,-3.09 ; -42.048,27.728 cw(c-41.196,27.499) USB1.2@-41.373,28.364 ; -41.965,28.04 cw(c-41.269,27.854) USB1.2@-41.413,28.56 ; -41.932,27.612 ccw(c-42.161,28.464) USB1.2@-41.296,28.287 ; -41.62,27.695 ccw(c-41.806,28.391) USB1.2@-41.1,28.247 ; USB1.2@-41.36,28.3 -42.86,26.8 -46.534,26.8 -47.7,25.634 -47.7,4.334 -55.124,-3.09 ; -55.572,-3.09 cw(c-55.572,-2.187) -56.245,-2.79 ccw(c-55.572,-2.187) -55.572,-3.09 ; -55.572,-3.09 ccw(c-55.572,-3.993) -56.245,-3.39 cw(c-55.572,-3.993) -55.572,-3.09 ; -55.124,-3.09 cw(c-55.124,-1.785) -56.096,-2.656 ccw(c-55.124,-1.785) -55.124,-3.09 ; -55.124,-3.09 ccw(c-55.124,-4.395) -56.096,-3.524 cw(c-55.124,-4.395) -55.124,-3.09 ; -42.273,27.387 cw(c-41.36,26.473) -41.36,27.765 ccw(c-41.36,26.473) -42.273,27.387 ; -42.273,27.387 ccw(c-43.187,28.3) -41.895,28.3 cw(c-43.187,28.3) -42.273,27.387 ; -41.932,27.728 cw(c-41.36,27.156) -41.36,27.965 ccw(c-41.36,27.156) -41.932,27.728 ; -41.932,27.728 ccw(c-42.504,28.3) -41.695,28.3 cw(c-42.504,28.3) -41.932,27.728
VCC: C1.1 C2.1 IC1.1 J1.2 | length 39.3
  Top Layer w1.5: C1.1@-18.8,15.9 -13.55,15.9 -11.7,17.75 -11.7,20.29 -13.755,22.345 -13.755,30.245 J1.2@-5,39 ; -6.28,37.72 cw(c-5,36.439) -5,38.25 ccw(c-5,36.439) -6.28,37.72 ; -6.28,37.72 ccw(c-7.561,39) -5.75,39 cw(c-7.561,39) -6.28,37.72
pads on no net: IC1.5 J3.1 J3.4 J3.6 J3.7 J3.8 J3.9

## Polygon pours and split planes (outlines as drawn)
GND on Top Layer "Bottom Layer-No Net" (solid, remove dead copper, pour order 4): -62,44.5 -62,-44.5 62.1,-44.5 62.1,44.5
GND on Bottom Layer "Bottom Layer-No Net" (solid, remove dead copper, pour order 3): -62,44.5 -62,-44.5 62,-44.5 62,44.5

## Keep-outs
Keep-Out Layer:
  the board outline again, w0.254

## Silkscreen, mask and mechanical layers (free items; w line width, h text height)
Top Overlay:
  lines w0.254: -61.2,-35 -50,-35 -50,-43.7 ; -61.2,35 -50,35 -50,43.7 ; 50,-43.7 50,-35 61.2,-35 ; 50,43.7 50,35 61.2,35
  text "阿波罗工业控制器" at 53.1,2.6 h5 r90
  text "十六路输入  V1.1" at 59.2,2.4 h5 r90
  text "月无声® YWS®" at 56.6,-29.6 h5 r90
Bottom Overlay:
  text "东莞市月无声电子" at -20.9,-37.3 h5
  text "www.yuewusheng.com" at -18.5,-40.8 h4

## Dimensions
-61.2,35 to -61.2,-35 on Top Overlay
-50,43.7 to 50,43.7 on Top Overlay
-61.2,-43.7 to 61.2,-43.7 on Top Overlay
-61.2,43.7 to -61.2,-43.7 on Top Overlay

## Text inside footprints (layer, text, board x,y; h text height)
J3: Top Overlay "1" at -28.6,-29.2 h1.5 r180; Top Overlay "5" at -40,-29 h1.5 r180; Top Overlay "9" at -38.3,-31.8 h1.5 r180; Top Overlay "6" at -29.8,-31.8 h1.5 r180
USB1: Top Overlay "4" at -45.17,30.332 h1.27 r90; Top Overlay "1" at -45.17,27.792 h1.27 r90